# Altium PCB PCB.PcbDoc
Units mm, origin at the board's own origin, x right, y up, seen from the top; angles counter-clockwise.
Board outline 20 x 40 mm, 2 copper layers (Top Layer, Bottom Layer); 5 components, 0 nets, 101 pads, 2 vias.
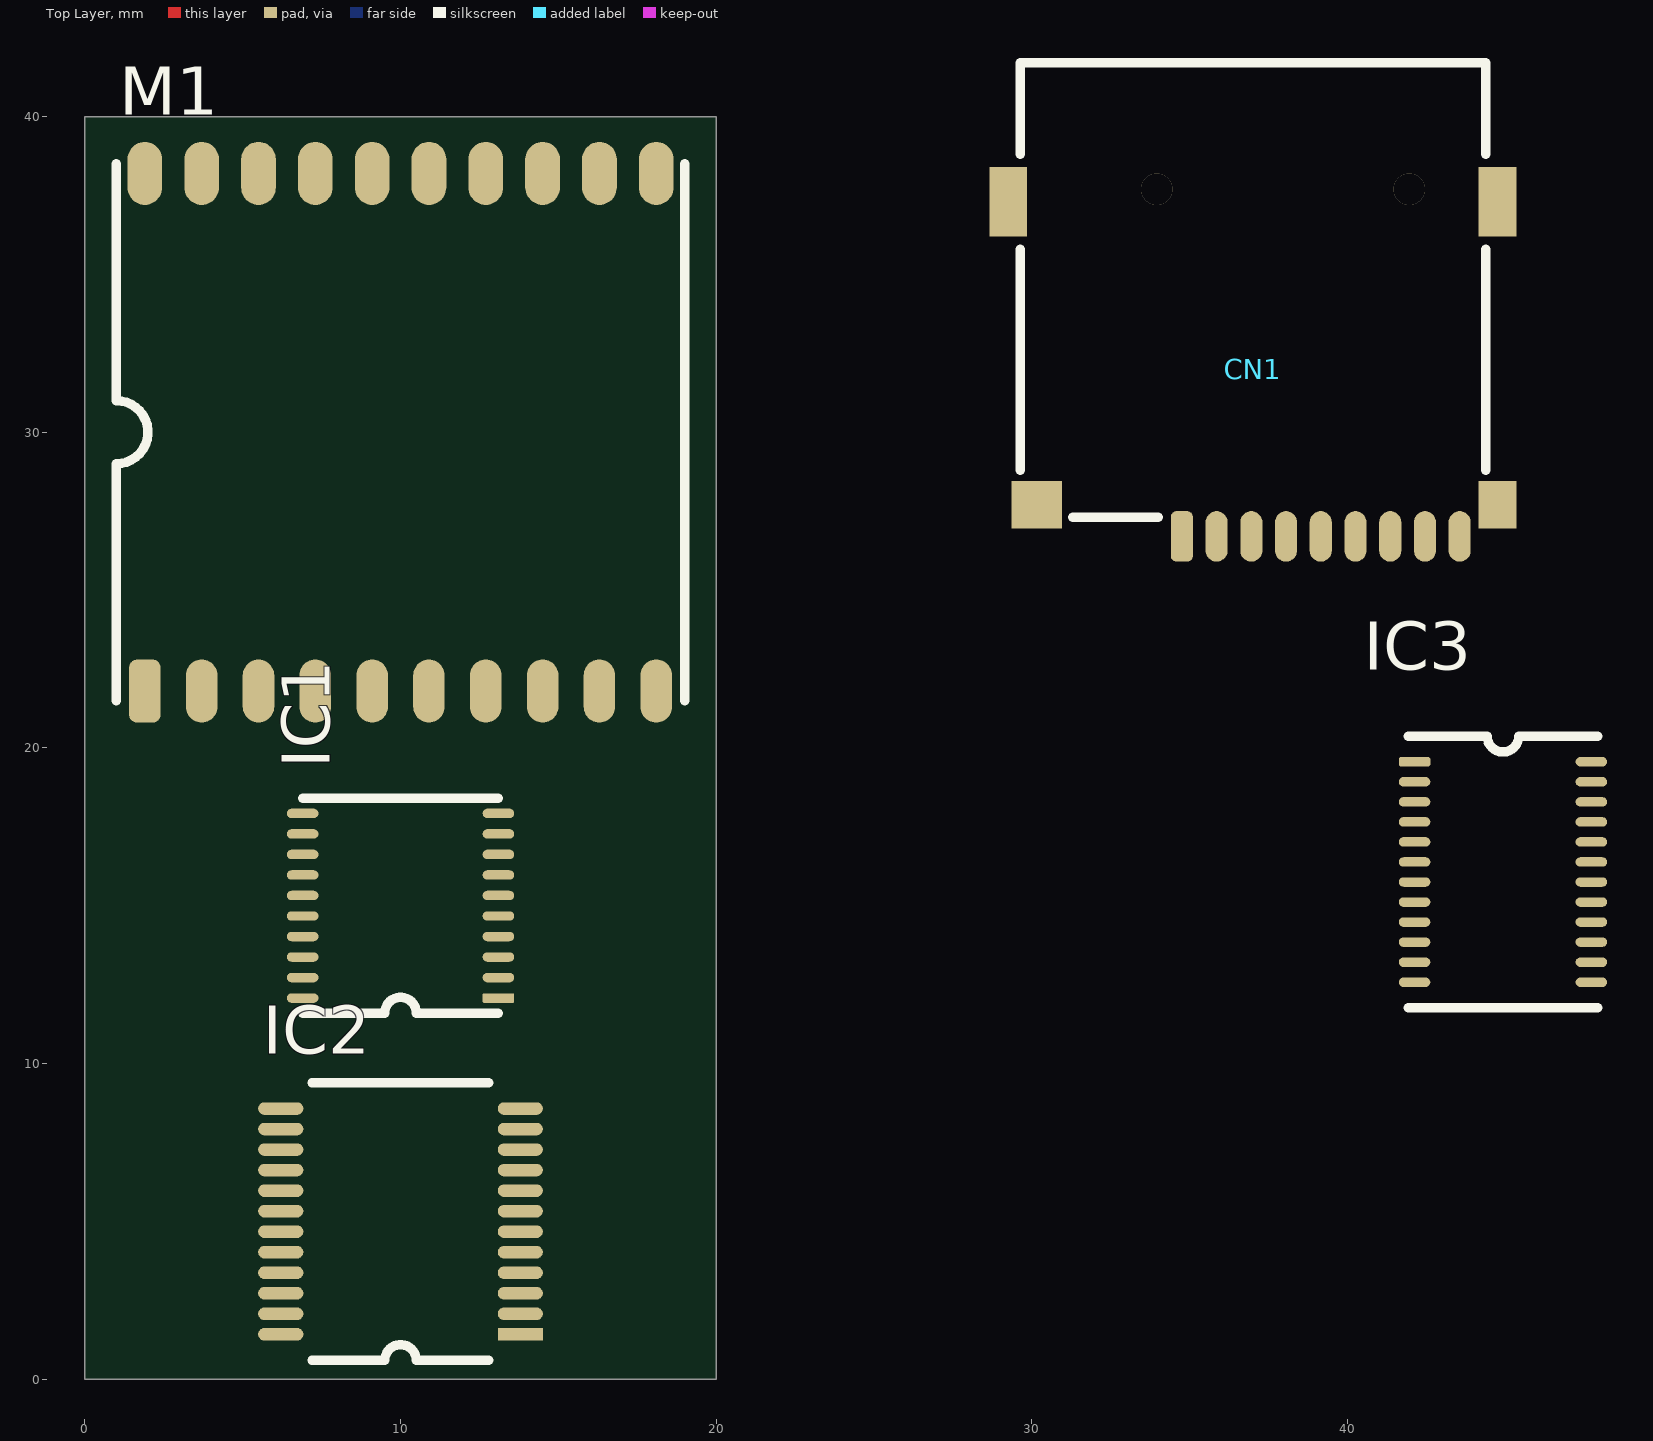
[diagram p0: Top Layer view]
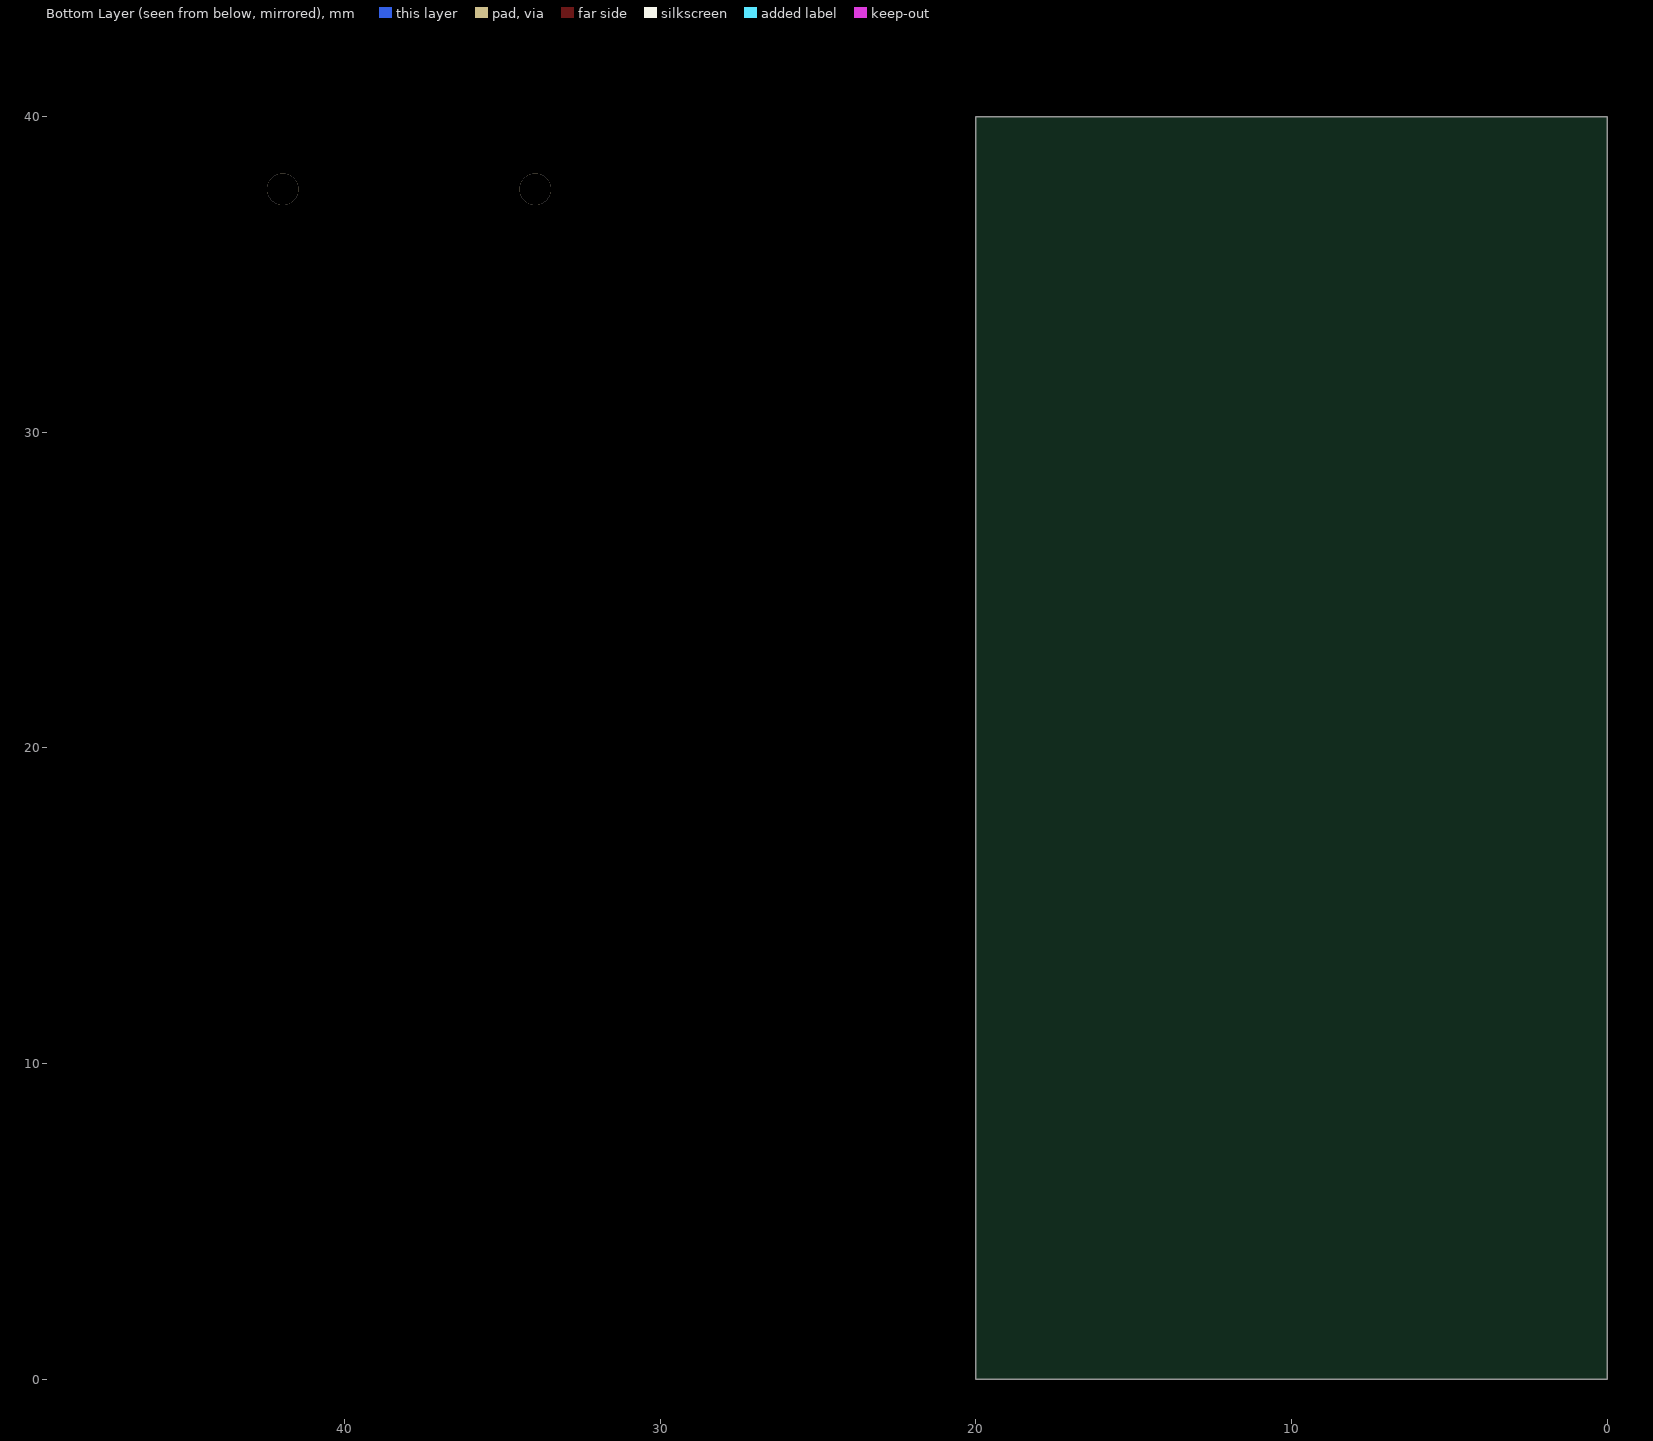
[diagram p1: Bottom Layer view, seen from below]

## Layer stack, top to bottom
Top Solder: solder mask 0.0102, Solder Resist, Dk 3.5
Top Layer: signal copper 0.0356
Dielectric 1: dielectric 0.32, FR-4, Dk 4.8
Bottom Layer: signal copper 0.0356
Bottom Solder: solder mask 0.0102, Solder Resist, Dk 3.5

## Board outline
0,0 20,0 20,40 0,40

## Design rules (kind name [scope] priority, off if disabled: settings)
Clearance [All] p1: gap=0.254 ignorepadtopadclearanceinfootprint=FALSE except(0: Arc-Hole Track-Hole SMDPad-Hole THPad-Hole Via-Hole Fill-Hole Poly-Hole Region-Hole Text-Hole)
PolygonConnect [All] p1: connectstyle=Relief reliefconductorwidth=0.254 reliefentries=4 polygonreliefangle="90 Angle" airgapwidth=0.254
RoomDefinition Sheet [InComponentClass('Sheet')] p1: confinementstyle=ConfineIn formatcopy=TRUE lockcomponents=FALSE outline -124.079,-82.931 -73.279,-82.931 -73.279,-57.531 -124.079,-57.531
RoutingVias [All] p1: holewidth=0.711 width=1.27 viastyle="Through Hole" minholewidth=0.711 minwidth=1.27 maxholewidth=0.711 maxwidth=1.27
SolderMaskExpansion [All] p1: expansion=0.102 istentingtop=FALSE
Width [All] p1: maxlimit=0.254 minlimit=0.254 preferedwidth=0.254
30 further rules are at their usual default settings.

## Components (designator, comment, footprint, x,y, rotation, side; value= is the part's Value field where it differs from the comment)
CN1 "SD Card" "SMD-SD CARD" 37,32 r180 top
IC1 "STM32G030F6P6" TSSOP-20 10,15 r180 top
IC2 "TB6612FNG" SSOP-24 10,5 r90 top
IC3 "MH2024K-24SS" QSOP-24 44.921,16.069 r0 top
M1 "VC-02" SMD,17x18mm(VC-02) 10,30 r90 top

## Footprints (in the part's own frame and the unit in brackets; to place one, negate y for a bottom-side part, rotate by r counter-clockwise, add the part's x,y. Pads: shape width x height; smd on the part's side, far side on the other; paste and mask are expansions set on the pad)
QSOP-24 [mm]
  rrect50% 1x0.3 smd: 1(-2.8,3.492)
  oval 1x0.3 smd: 2(-2.8,2.857) 3(-2.8,2.222) 4(-2.8,1.587) 5(-2.8,0.953) 6(-2.8,0.318) 7(-2.8,-0.318) 8(-2.8,-0.953) 9(-2.8,-1.587) 10(-2.8,-2.222) 11(-2.8,-2.857) 12(-2.8,-3.492) 13(2.8,-3.492) 14(2.8,-2.857) 15(2.8,-2.222) 16(2.8,-1.587) 17(2.8,-0.953) 18(2.8,-0.318) 19(2.8,0.318) 20(2.8,0.953) 21(2.8,1.587) 22(2.8,2.222) 23(2.8,2.857) 24(2.8,3.492)
  silkscreen extent -3,-4.3 3,4.3, body extent -3,-4.33 3,4.33, height 1.75
SMD,17x18mm(VC-02) [mm]
  rrect50% 2x1 smd: 1(-8.2,8.1)
  oval 2x1 smd: 2(-8.2,6.3) 3(-8.2,4.5) 4(-8.2,2.7) 5(-8.2,0.9) 6(-8.2,-0.9) 7(-8.2,-2.7) 8(-8.2,-4.5) 9(-8.2,-6.3) 10(-8.2,-8.1)
  oval 2x1.1 smd: 11(8.2,-8.1) 12(8.2,-6.3) 13(8.2,-4.5) 14(8.2,-2.7) 15(8.2,-0.9) 16(8.2,0.9) 17(8.2,2.7) 18(8.2,4.5) 19(8.2,6.3) 20(8.2,8.1)
  silkscreen extent -8.5,-9 8.5,9, body extent -8.5,-9 8.5,9, height 3.4
"SMD-SD CARD" [mm]
  rrect50% 0.7x1.6 smd mask+0.1: 1(2.25,5.3)
  oval 0.7x1.6 smd mask+0.1: 2(1.15,5.3) 3(0.05,5.3) 4(-1.05,5.3) 5(-2.15,5.3) 6(-3.25,5.3) 7(-4.35,5.3) 8(-5.45,5.3) 9(-6.55,5.3)
  rect 1.6x1.5 smd mask+0.1: S1(6.85,4.3)
  rect 1.2x1.5 smd mask+0.1: S2(-7.75,4.3)
  rect 1.2x2.2 smd mask+0.1: S3(-7.75,-5.3) S4(7.75,-5.3)
  silkscreen extent -7.37,-9.7 7.37,4.7, body extent -7.98,-12.28 8.02,5.62, height 1.84
SSOP-24 [mm]
  rect 0.4x1.43 smd: 1(-3.575,-3.795)
  oval 0.4x1.43 smd: 2(-2.925,-3.795) 3(-2.275,-3.795) 4(-1.625,-3.795) 5(-0.975,-3.795) 6(-0.325,-3.795) 7(0.325,-3.795) 8(0.975,-3.795) 9(1.625,-3.795) 10(2.275,-3.795) 11(2.925,-3.795) 12(3.575,-3.795) 13(3.575,3.795) 14(2.925,3.795) 15(2.275,3.795) 16(1.625,3.795) 17(0.975,3.795) 18(0.325,3.795) 19(-0.325,3.795) 20(-0.975,3.795) 21(-1.625,3.795) 22(-2.275,3.795) 23(-2.925,3.795) 24(-3.575,3.795)
  silkscreen extent -4.4,-2.79 4.4,2.81, body extent -4.32,-3.95 4.32,3.95, height 1.98
TSSOP-20 [mm]
  rrect25% 1x0.3 smd: 1(-3.1,2.925)
  oval 1x0.3 smd: 2(-3.1,2.275) 3(-3.1,1.625) 4(-3.1,0.975) 5(-3.1,0.325) 6(-3.1,-0.325) 7(-3.1,-0.975) 8(-3.1,-1.625) 9(-3.1,-2.275) 10(-3.1,-2.925) 11(3.1,-2.925) 12(3.1,-2.275) 13(3.1,-1.625) 14(3.1,-0.975) 15(3.1,-0.325) 16(3.1,0.325) 17(3.1,0.975) 18(3.1,1.625) 19(3.1,2.275) 20(3.1,2.925)
  silkscreen extent -3.1,-3.4 3.1,3.4, body extent -3.2,-3.25 3.2,3.25, height 1.1

## Part data
CN1: library part "TF PUSH", "-25℃~+90℃ Push-Push 2mm Connector and Ejector MicroSD Card (TF Card) SMD PC Card Sockets ROHS", LCSC Part #=C393941, Manufacturer="SHOU HAN", Package=SMD, Mfr.Part #="TF PUSH"
IC1: "ARM-M0 64MHz 18 TSSOP-20 Microcontrollers ROHS", DigiKey Part Number=497-STM32G030F6P6-ND, LCSC Part #=C724040, Manufacturer=ST, Package=TSSOP-20, Link=https://www.lcsc.com/product-detail/Audio-Amplifiers_Jiaxing-Heroic-Elec-Tech-HT6818_C130782.html, Mfr.Part #=STM32G030F6P6, So_Chna_Cam=0
IC2: "1A Brush DC Motor 2.7V~5.5V Parallel SSOP-24 Motor Driver ICs ROHS", DigiKey Part Number=TB6612FNGC8ELTR-ND, LCSC Part #=C141517, Manufacturer=TOSHIBA, Mfr.Part #=TB6612FNG,C,8,EL, Package=SSOP-24
IC3: "Compact MP3/WAV/WMA audio decoder module with built-in amplifier and TF/USB support for embedded systems and microcontroller projects.", Manufacturer=GD, Package=QSOP24
M1: library part VC-02_EN, "RF TXRX MODULE OFFLINE VOICE SMD", DigiKey Part Number=4570-VC-02TR-ND, LCSC Part #=C3039678, Manufacturer=Ai-Thinker, Package=SMD,17x18mm, Mfr.Part #=VC-02_EN

## Via types
v1: diameter 1, hole 1, Top Layer to Bottom Layer, 2 vias

## Nets (pads, with @x,y where several pads share a name; then routed paths per layer and width w, separated by ;. In a path a pad name is that pad's centre, name@x,y a point inside that pad or via, vN(x,y) a via of type N, cw(c..) or ccw(c..) an arc to the next point about the centre after c; other vN are vias at no path point)
pads on no net: CN1.1 CN1.2 CN1.3 CN1.4 CN1.5 CN1.6 CN1.7 CN1.8 CN1.9 CN1.S1 CN1.S2 CN1.S3 CN1.S4 IC1.1 IC1.2 IC1.3 IC1.4 IC1.5 IC1.6 IC1.7 IC1.8 IC1.9 IC1.10 IC1.11 IC1.12 IC1.13 IC1.14 IC1.15 IC1.16 IC1.17 IC1.18 IC1.19 IC1.20 IC2.1 IC2.2 IC2.3 IC2.4 IC2.5 IC2.6 IC2.7 IC2.8 IC2.9 IC2.10 IC2.11 IC2.12 IC2.13 IC2.14 IC2.15 IC2.16 IC2.17 IC2.18 IC2.19 IC2.20 IC2.21 IC2.22 IC2.23 IC2.24 IC3.1 IC3.2 IC3.3 IC3.4 IC3.5 IC3.6 IC3.7 IC3.8 IC3.9 IC3.10 IC3.11 IC3.12 IC3.13 IC3.14 IC3.15 IC3.16 IC3.17 IC3.18 IC3.19 IC3.20 IC3.21 IC3.22 IC3.23 IC3.24 M1.1 M1.2 M1.3 M1.4 M1.5 M1.6 M1.7 M1.8 M1.9 M1.10 M1.11 M1.12 M1.13 M1.14 M1.15 M1.16 M1.17 M1.18 M1.19 M1.20
copper on no net:
  other v1: 33.95,37.7 41.95,37.7